# EAGLE board LCDShieldC144MVGD 1.2 (EAGLE 5.11)
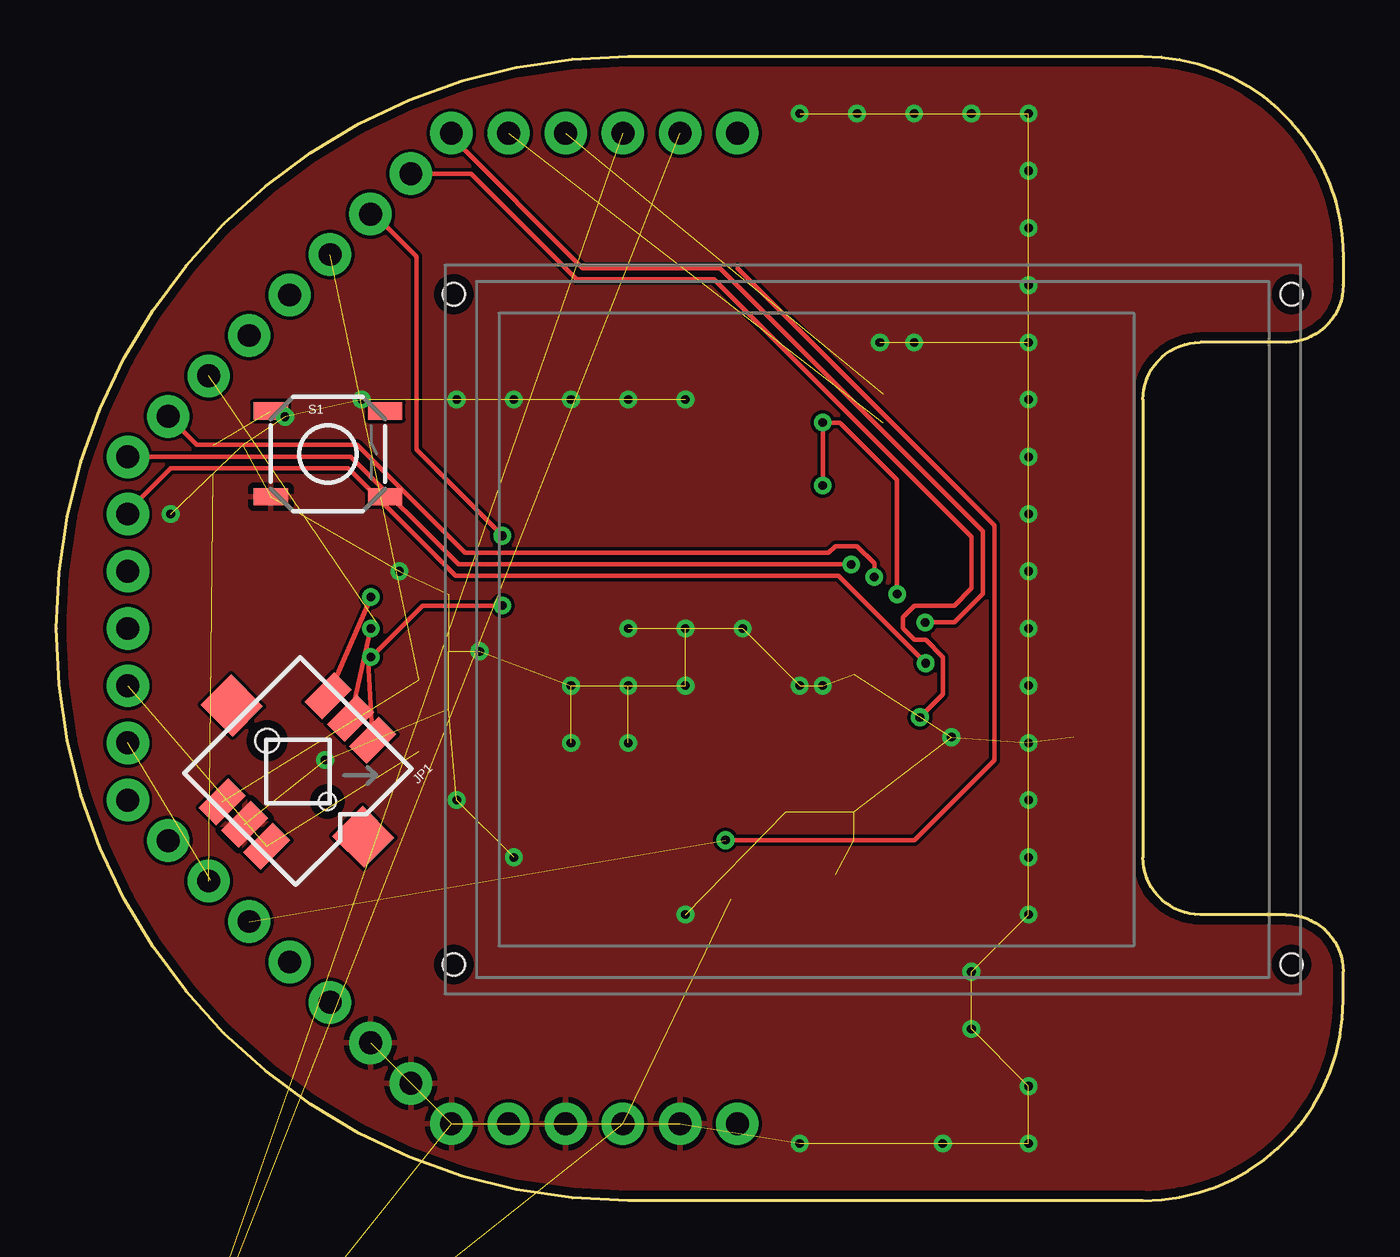
[diagram p0: board, top side]
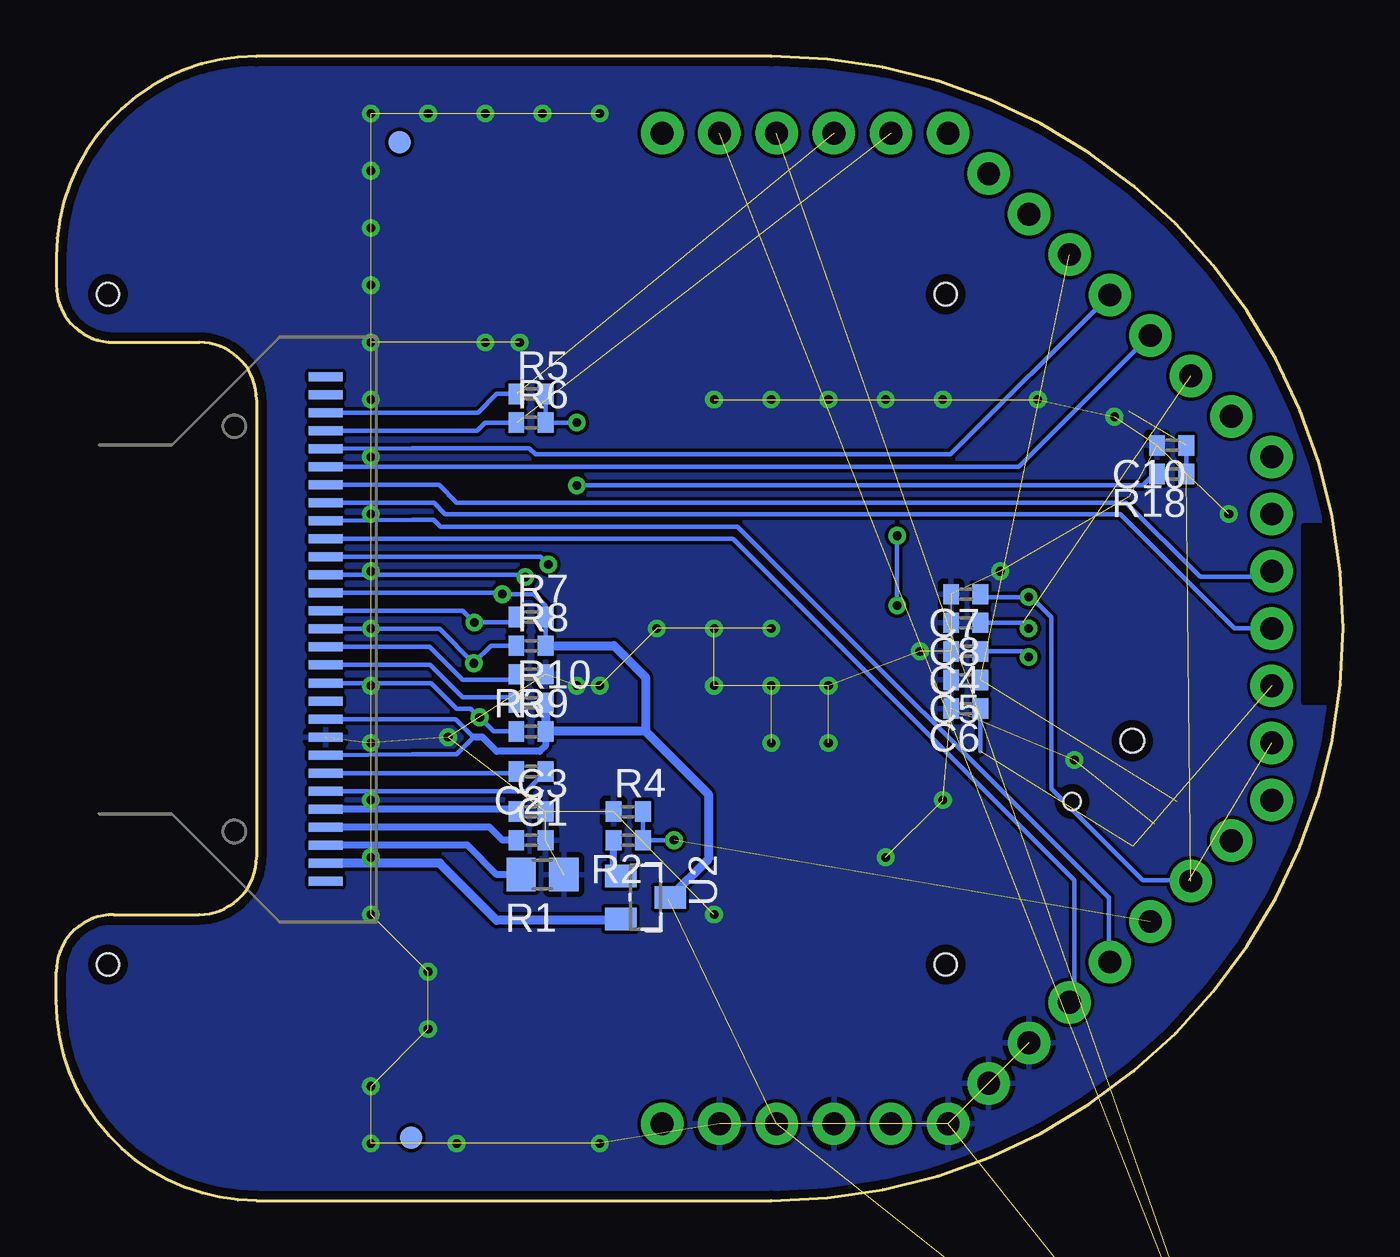
[diagram p1: board, bottom side, seen from below]

Size 57.15 x 50.8 mm. Coordinates in mm from the lower left corner, seen from the top.
Outline: 25.4,0 arc-180 25.4,50.8 48.26,50.8 arc-90 57.15,41.91 57.15,40.64 arc-90 54.61,38.1 50.8,38.1 arc90 48.26,35.56 48.26,15.24 arc90 50.8,12.7 54.61,12.7 arc-90 57.15,10.16 57.15,8.89 arc-90 48.26,0 25.4,0
Copper layers (1*16): Top 0.035mm / dielectric 1.5mm / Bottom 0.035mm
Design rules "PDX (Production)": minimum track width 6mil, minimum drill 15mil, track to track 6mil, track to pad 6mil, pad to pad 4mil, via to via 6mil, smd to smd 4mil, copper to edge 15mil, drill to drill 6mil, minimum pad ring 10mil, minimum via ring 8mil, stop-mask expansion 4mil, vias tented up to drill 25mil, thermal gap 10mil
bRestrict: area 0.5,22.1 to 1.8,30

## Footprints (pad centres in the part's own frame; a part is rotated, then mirrored left to right if it is on the bottom)
C0402 = smd 0.7 x 0.9: 1 -0.65,0; 2 0.65,0
JOYSTICK_MINI = smd 1.85 x 1.1: A 0,2.8; B 6.65,2.8; C 0,0; CTR 0,1.4; D 6.65,0; GND 6.65,1.4 | smd 1.9 x 2: NC 3.325,5.53; NC@0 3.33,-2.72 | hole 0.75: 3.34,3.295 | hole 1.05: 3.325,-0.5
FIDUCIAL-1X2.5 = smd 1 x 1: 1 0,0
#NEBULA-PTH@1 = drill 1.016 pad 1.88 round: 3.3V -25.637,-47.388; 5V -30.716,-47.388; A0 -36.848,-7.004; A1 -38.645,-8.8; A2 -40.44,-10.596; A3 -42.237,-12.392; A4 -47.625,-22.86; A5 -47.625,-25.4; A6 -40.44,-40.204; A7 -38.645,-42; BAT -20.557,-47.388; COM1_RX -25.636,-3.412; COM1_TX -23.096,-3.412; COM2_RX -47.625,-30.48; COM2_TX -47.625,-27.94; D0 -47.625,-20.32; D1 -47.625,-17.78; D2 -45.829,-15.984; D3 -44.032,-14.188; DAC1 -47.625,-33.02; DAC2 -45.829,-34.816; GND1 -36.848,-43.796; GND2 -35.052,-45.592; GND3 -33.256,-47.388; GND4 -28.177,-47.388; GND5 -23.097,-47.388; MCO -20.556,-3.412; T0 -28.176,-3.412; T1 -30.716,-3.412; T2 -33.256,-3.412; T3 -35.052,-5.208; TA0 -44.032,-36.612; TA1 -42.237,-38.408
R0805 = smd 1.3 x 1.5: 1 -0.95,0; 2 0.95,0
R0402 = smd 0.7 x 0.9: 1 -0.65,0; 2 0.65,0
SPARKFUN_TACTILE_SWITCH_SMD = smd 1.524 x 0.762: 1 -2.54,1.905; 2 2.54,1.905; 3 -2.54,-1.905; 4 2.54,-1.905
VARITRONIX_C144MVGD_FOLDED = smd 0.4 x 1.5 bottom: P1 27.35,-10.06; P2 26.55,-10.06; P3 25.75,-10.06; P4 24.95,-10.06; P5 24.15,-10.06; P6 23.35,-10.06; P7 22.55,-10.06; P8 21.75,-10.06; P9 20.95,-10.06; P10 20.15,-10.06; P11 19.35,-10.06; P12 18.55,-10.06; P13 17.75,-10.06; P14 16.95,-10.06; P15 16.15,-10.06; P16 15.35,-10.06; P17 14.55,-10.06; P18 13.75,-10.06; P19 12.95,-10.06; P20 12.15,-10.06; P21 11.35,-10.06; P22 10.55,-10.06; P23 9.75,-10.06; P24 8.95,-10.06; P25 8.15,-10.06; P26 7.35,-10.06; P27 6.55,-10.06; P28 5.75,-10.06; P29 4.95,-10.06 | hole 1: 1.29,-0.39; 1.29,-37.59; 31.05,-37.59; 31.05,-0.39
DUBLIB_SOT23 = smd 1 x 1.4: 1 -0.95,-1.1; 2 0.95,-1.1; 3 0,1.1
TSSOP8 = smd 1.2 x 0.35: 1 -2.925,0.975; 2 -2.925,0.325; 3 -2.925,-0.325; 4 -2.925,-0.975; 5 2.925,-0.975; 6 2.925,-0.325; 7 2.925,0.325; 8 2.925,0.975

## Placement (x,y rotation side)
C1  1uF  [C0402]  36.07,16 0 bottom
C2  1uF  [C0402]  36.07,19.05 180 bottom
C3  1uF  [C0402]  36.07,17.27 0 bottom
C4  220pF  [C0402]  16.76,24.38 180 bottom
C5  220pF  [C0402]  16.76,23.11 180 bottom
C6  220pF  [C0402]  16.76,21.84 180 bottom
C7  220pF  [C0402]  16.76,26.92 180 bottom
C8  220pF  [C0402]  16.76,25.65 180 bottom
C9  0.1uF  [C0402]  -2.54,-22.86 0 top  (outside the outline)
C10  220pF  [C0402]  7.62,33.53 180 bottom
INFO3  Warren D Greenway and Evan Teitelman  [%CC-BY-SA]  -2.54,-10.16 0 top  (outside the outline)
JP1  JOYSTICK_MINI4UCON  [JOYSTICK_MINI]  12.07,22.41 225 top
JP2  FIDUCIAL1X2.5  [FIDUCIAL-1X2.5]  41.91,46.99 0 bottom
JP3  FIDUCIAL1X2.5  [FIDUCIAL-1X2.5]  41.4,2.79 0 bottom
LOGO1  #PYGMYLOGOLARGE  [#PYGMYLOGO]  27.94,25.4 0 bottom
NEBULA1  #NEBULAPTH  [#NEBULA-PTH@1]  50.8,50.8 0 top
R1  10  [R0805]  35.56,14.48 180 bottom
R2  10K  [R0402]  31.75,16 180 bottom
R3  47K  [R0402]  36.07,23.37 180 bottom
R4  47K  [R0402]  31.75,17.27 0 bottom
R5  47K  [R0402]  36.07,35.81 0 bottom
R6  47K  [R0402]  36.07,34.54 0 bottom
R7  47K  [R0402]  36.07,25.91 0 bottom
R8  47K  [R0402]  36.07,24.64 0 bottom
R9  47K  [R0402]  36.07,20.83 0 bottom
R10  47K  [R0402]  36.07,22.1 0 bottom
R18  47K  [R0402]  7.62,32.26 180 bottom
S1  SWITCH-MOMENTARY-2SMD  [SPARKFUN_TACTILE_SWITCH_SMD]  12.07,33.15 0 top
U1  VARITRONIX_VL-PS-COG-C144MVGD-04FOLDED  [VARITRONIX_C144MVGD_FOLDED]  55.24,41.53 270 top
U2  BIPOLAR-PMBT6428  [DUBLIB_SOT23]  30.99,13.46 270 bottom
U$1  EEPROM-ATMEL-AT24HC02B  [TSSOP8]  0,-15.24 0 top  (outside the outline)

## Library data of the parts
C1-C10 R1-R10 R18 = rcl
INFO3 NEBULA1 = PygmyBoards
JP1-JP3 = SparkFun
LOGO1 S1 U1 U2 U$1 = Pygmy

## Nets
3.3V: C9.1 NEBULA1.3.3V R5.2 R6.2 R7.2 R8.2 R9.2 R10.2 R18.2 U1.P8 U1.P10 U1.P17 U2.3 U$1.8
A0: NEBULA1.T0 R5.1 U1.P27
BAT: NEBULA1.BAT
BL: NEBULA1.TA1 R2.1 R4.2
CENTER: C8.1 JP1.CTR NEBULA1.D3
CS: NEBULA1.T3 R9.1 U1.P12
D0: NEBULA1.A2 U1.P25
D1: NEBULA1.A3 U1.P24
D2: NEBULA1.A4 U1.P23
D3: NEBULA1.A5 U1.P22
D4: NEBULA1.A6 U1.P21
D5: NEBULA1.A7 U1.P20
D6: NEBULA1.D1 U1.P19
D7: NEBULA1.D2 U1.P18
DOWN: C5.1 JP1.D NEBULA1.A1
GND: C1.2 C3.2 C4.2 C5.2 C6.2 C7.2 C8.2 C9.2 C10.2 JP1.GND NEBULA1.GND1 NEBULA1.GND2 NEBULA1.GND3 NEBULA1.GND4 NEBULA1.GND5 R1.1 R3.1 R4.1 S1.3 U1.P9 U$1.1 U$1.2 U$1.3 U$1.4 U$1.7
HOME: C10.1 NEBULA1.TA0 R18.1 S1.1
IF1: R3.2 U1.P14
IF3: R10.1 U1.P13
LEFT: C6.1 JP1.B NEBULA1.COM2_TX
N$1: C1.1 U1.P4
N$2: C3.1 U1.P5
N$3: C2.1 U1.P6
N$4: C2.2 U1.P7
N$5: R1.2 U1.P3
N$6: U1.P2 U2.2
N$7: R2.2 U2.1
RD: NEBULA1.T2 R7.1 U1.P16
RIGHT: C7.1 JP1.C NEBULA1.COM2_RX
RST: NEBULA1.D0 R8.1 U1.P15
SCL: NEBULA1.COM1_TX U$1.6
SDA: NEBULA1.COM1_RX U$1.5
UP: C4.1 JP1.A NEBULA1.A0
WR: NEBULA1.T1 R6.1 U1.P26

## Tracks (layer width: path | path; a pad name or v marks a point on that pad's centre or on a via)
3.3V  (via drill 0.38)  (3 unrouted)
  Top 0.203: v37.34,26.92 37.34,32 34.8,34.54 v34.04,34.54 v34.04,31.75
  Bottom 0.203: R7.2 R8.2 | R5.2 R6.2 v34.04,34.54 | R9.2 R10.2 | U1.P17 37.39,26.98 v37.34,26.92 35.94,26.92 35.43,26.42 35.43,25.92 | 8.38,32.26 8.89,31.75 v34.04,31.75 | U1.P10 39.41,21.38 38.61,20.57 39.37,19.81 41.34,19.81 U1.P8
  Bottom 0.254: 35.43,25.92 R7.2 | U2.3 29.97,13.38 | R18.2 8.38,32.26
  Bottom 0.305: 38.61,20.57 38.23,20.57 37.59,19.94 35.69,19.94 35.43,20.19 35.43,20.81
  Bottom 0.406: U2.3 28.19,15.16 28.19,18.03 30.99,20.83 | R10.2 35.43,22.08 35.43,20.81 | 30.99,20.83 R9.2 | R8.2 32.38,24.64 30.99,23.24 30.99,20.83
A0  (1 unrouted)
  Bottom 0.203: U1.P27 38.43,34.98 37.59,35.81 R5.1
BL  (via drill 0.38)  (1 unrouted)
  Top 0.203: 30.24,41.38 41.66,29.97 41.66,19.56 38.1,16 v29.72,16
  Bottom 0.203: v29.72,16 R2.1 R4.2
CENTER  (via drill 0.38)  (1 unrouted)
  Top 0.203: JP1.CTR v13.97,25.4
  Bottom 0.203: v13.97,25.4 14.22,25.65 C8.1
CS  (via drill 0.38)
  Top 0.203: NEBULA1.T3 18.42,45.59 23.11,40.89 29.21,40.89 40.64,29.46 40.64,27.18 39.88,26.42 38.1,26.42 37.59,25.91 37.59,25.4 38.1,24.89 38.61,24.89 39.37,24.13 39.37,22.47 v38.35,21.46
  Bottom 0.203: R9.1 37.73,20.83 v38.35,21.46 38.74,21.84 39.37,21.84 40.51,22.98 U1.P12
D0
  Bottom 0.203: NEBULA1.A2 17.44,33.12 35.87,33.12 36.14,33.4 41.35,33.4 U1.P25
D1
  Bottom 0.203: NEBULA1.A3 14.39,32.58 U1.P24
D2
  Bottom 0.203: U1.P23 40.16,31.78 39.37,30.99 9.65,30.99 6.35,27.69 3.43,27.69 NEBULA1.A4
D3
  Bottom 0.203: U1.P22 40.38,30.98 39.88,30.48 9.91,30.48 4.83,25.4 NEBULA1.A5
D4
  Bottom 0.203: NEBULA1.A6 10.41,10.65 10.41,13.46 10.43,13.46 26.89,29.93 40.09,29.93 40.39,30.23 41.33,30.23 U1.P21
D5
  Bottom 0.203: U1.P20 27.09,29.38 11.94,14.22 11.94,9.02 NEBULA1.A7
D6  (via drill 0.38)
  Top 0.203: NEBULA1.D1 13.08,33.02 17.86,28.25 v35.31,28.25
  Bottom 0.203: U1.P19 35.64,28.58 v35.31,28.25
D7  (via drill 0.38)
  Top 0.203: v36.32,27.69 36.32,28.3 35.56,29.06 34.59,29.06 34.29,28.75 18.15,28.75 13.35,33.55 6.24,33.55 NEBULA1.D2 5.06,34.82
  Bottom 0.203: U1.P18 36.41,27.78 v36.32,27.69
DOWN  (2 unrouted)
GND  (via drill 0.38)  (76 unrouted)
  other vias: 34.04,22.86 33.02,22.86 39.75,20.57 13.56,35.56 22.86,35.56 27.94,35.56 40.64,10.16 22.86,22.86 39.37,2.54 43.18,2.54 43.18,5.08 17.78,17.78 18.8,24.38 43.18,12.7 33.02,48.26 35.56,48.26 38.1,48.26 40.64,48.26 43.18,48.26 43.18,45.72 43.18,43.18 43.18,40.64 43.18,38.1 43.18,35.56 43.18,33.02 43.18,30.48 43.18,27.94 43.18,25.4 43.18,22.86 43.18,20.32 43.18,17.78 43.18,15.24 11.94,19.56 33.02,2.54 40.64,7.62 20.32,15.24 27.94,12.7 22.86,20.32 25.4,20.32 25.4,22.86 27.94,22.86 10.16,34.8 15.24,27.94 17.78,35.56 20.32,35.56 25.4,35.56 25.4,25.4 27.94,25.4 30.48,25.4 38.1,38.1 36.58,38.1 5.08,30.48
  pour Bottom: -2.54,53.34 59.69,53.34 59.69,-2.54 -2.54,-2.54
  pour Top: -1.27,52.07 58.42,52.07 58.42,-1.27 -1.27,-1.27
HOME  (2 unrouted)
  Bottom 0.203: R18.1 C10.1
IF1
  Bottom 0.203: U1.P14 40.58,24.58 39.12,23.11 36.97,23.11 R3.2
IF3
  Bottom 0.203: U1.P13 40.54,23.78 39.12,22.35 36.97,22.35 R10.1
LEFT  (2 unrouted)
  Bottom 0.203: 16.11,19.94 C6.1
N$1
  Bottom 0.305: U1.P4 37.91,16.58 37.34,16 C1.1
N$2
  Bottom 0.305: U1.P5 36.72,17.38 C3.1
N$3
  Bottom 0.203: U1.P6 36.29,18.18 C2.1
N$4
  Bottom 0.203: U1.P7 36.79,18.98 C2.2
N$5
  Bottom 0.305: U1.P3 38.89,15.78 37.59,14.48 R1.2
N$6
  Bottom 0.406: U1.P2 40.12,14.98 37.59,12.45 32.15,12.45 U2.2
N$7
  Bottom 0.203: 32.4,14.47 32.15,14.47 U2.1
  Bottom 0.305: 32.4,14.47 R2.2
RD  (via drill 0.38)
  Top 0.203: NEBULA1.T2 17.54,47.23 23.37,41.4 29.46,41.4 41.15,29.72 41.15,26.94 39.88,25.67 v38.59,25.67
  Bottom 0.203: U1.P16 39.1,26.18 v38.59,25.67 36.95,25.67 R7.1
RIGHT  (via drill 0.38)  (1 unrouted)
  Top 0.203: v13.97,26.8 JP1.C
  Bottom 0.203: 6.82,14.19 6.86,14.22 8.89,14.22 12.95,18.29 12.95,25.91 13.84,26.8 v13.97,26.8 15.99,26.8 C7.1
RST  (via drill 0.38)
  Top 0.203: v38.61,23.86 34.73,27.74 17.73,27.74 12.95,32.51 5.08,32.51 3.18,30.61 NEBULA1.D0
  Bottom 0.203: U1.P15 40.13,25.38 v38.61,23.86 38.61,23.88 37.85,24.64 R8.1
SCL  (1 unrouted)
SDA  (1 unrouted)
UP  (via drill 0.38)
  Top 0.203: JP1.A 13.84,24 v13.97,24.13 16.26,26.42 v19.81,26.42 | NEBULA1.A0 14.12,43.8 16,41.91 16,33.33 v19.81,29.52
  Bottom 0.203: v13.97,24.13 14.22,24.38 C4.1 | v19.81,26.42 v19.81,29.52
WR  (1 unrouted)
  Bottom 0.203: U1.P26 38.47,34.18 38.1,34.54 R6.1

## Text on the board
bTest: Pygmy Nebula LCD Shield V1.0 | Design By: Warren D Grreenway | And Evan Teitelman
Document: Pygmy LCD Shield | Version 1.0 | Standard Grid: 50mil | Routing Grids: 8mil / 4mil
_tsilk: SPK+ | SPK- | SPWR